# EAGLE board Pwr_spl (EAGLE 7.2.0)
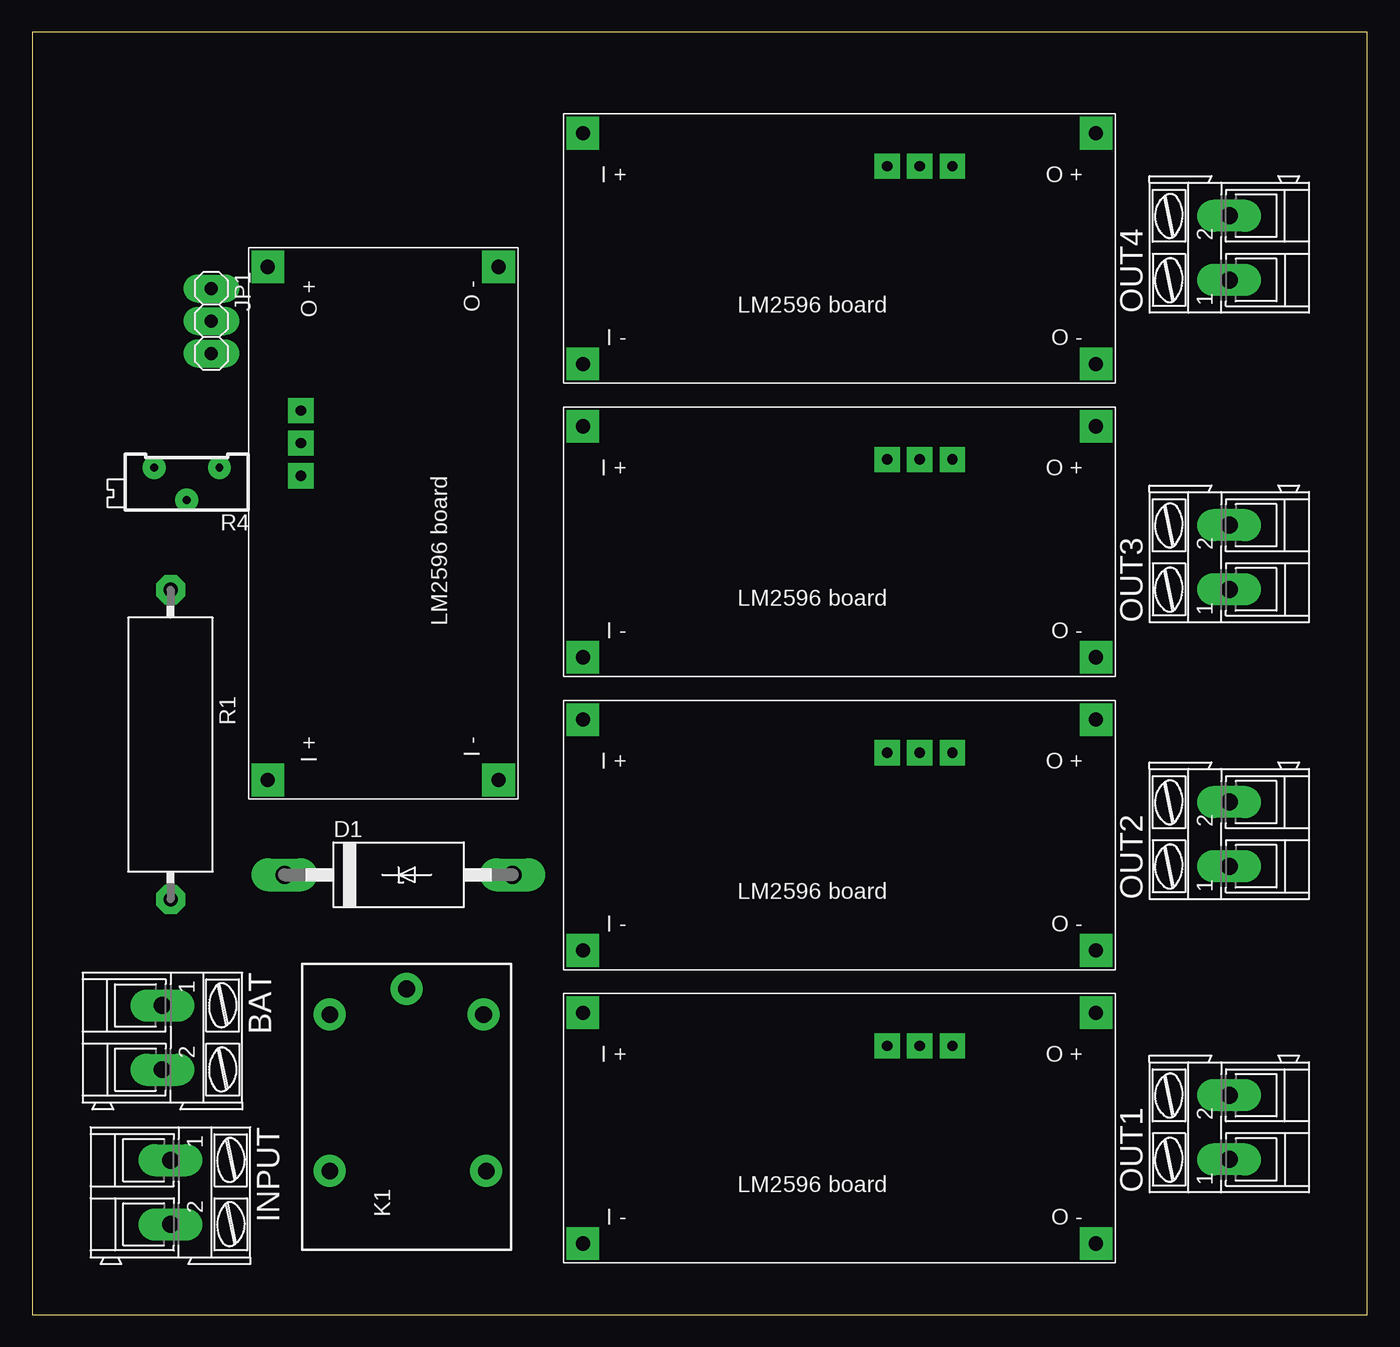
[diagram p0: board, top side]
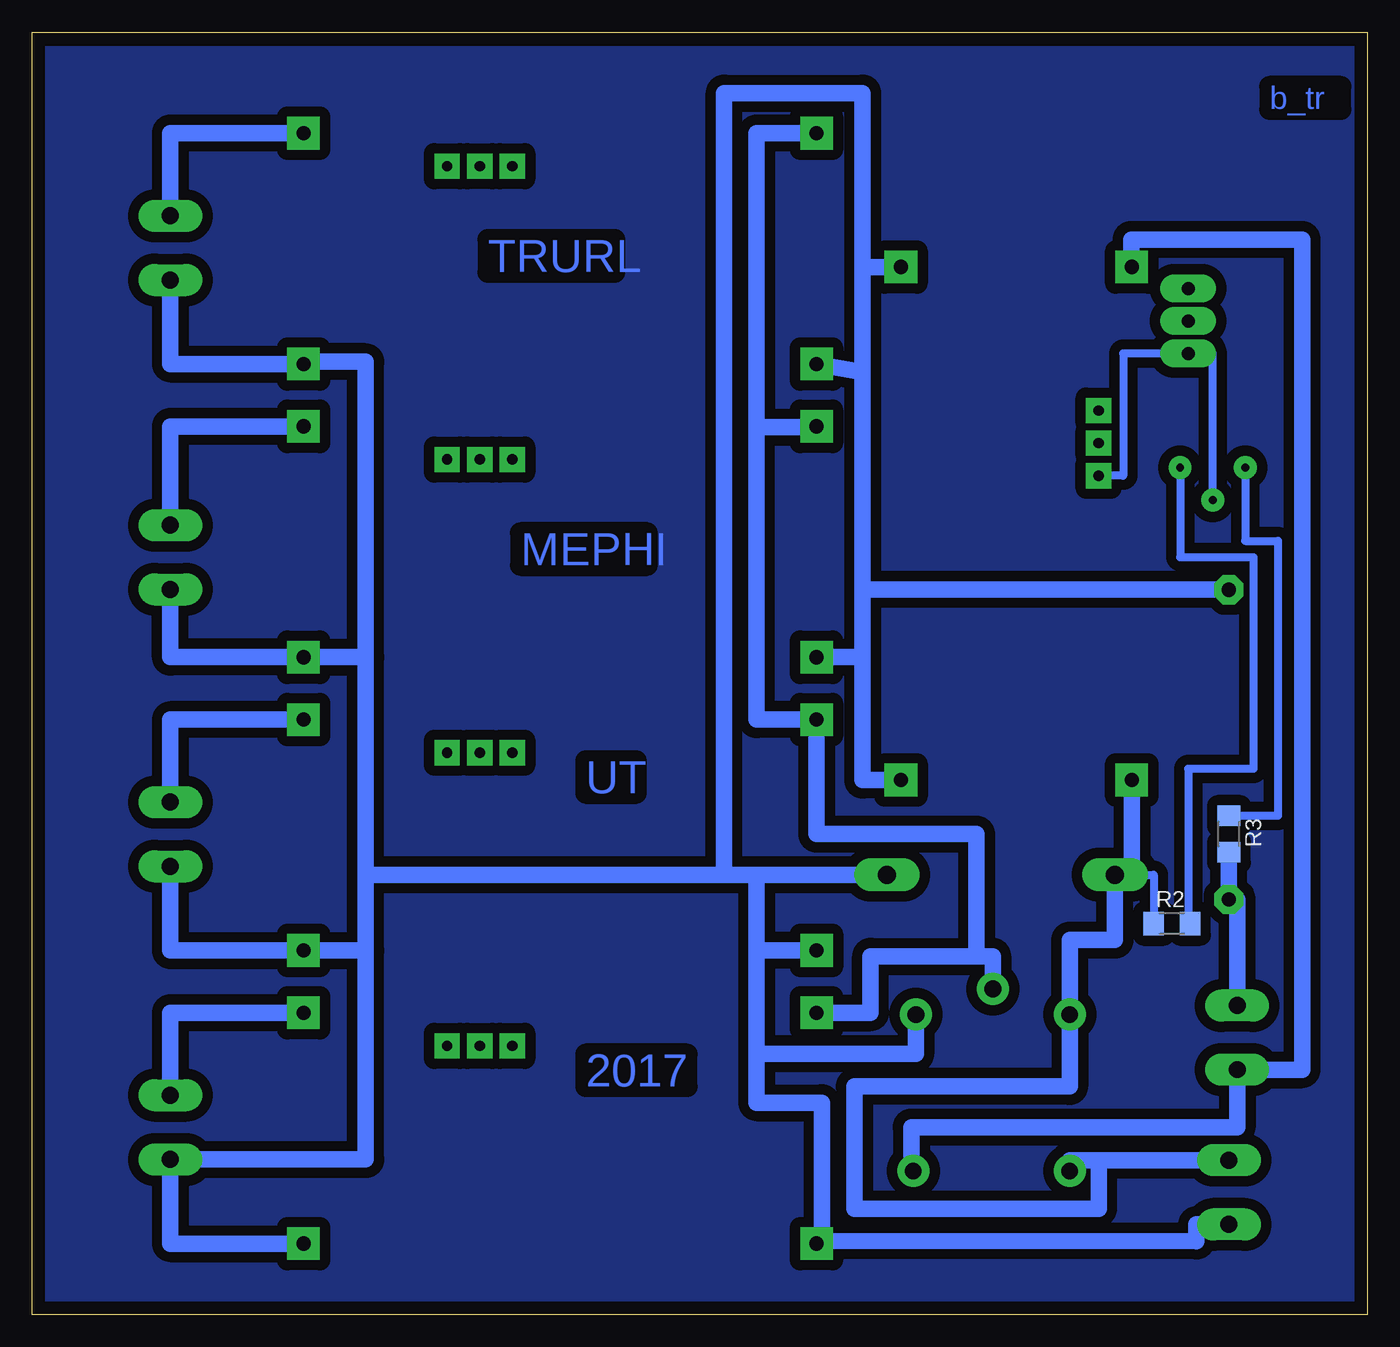
[diagram p1: board, bottom side, seen from below]

Size 104.12 x 100 mm. Coordinates in mm from the lower left corner, seen from the top.
Outline: 0,0 104.12,0 104.12,100 0,100 0,0
Copper layers (1*16): Top 0.035mm / dielectric 1.5mm / Bottom 0.035mm
Design rules "default *": minimum track width 10mil, minimum drill 24mil, track to track 8mil, track to pad 8mil, pad to pad 8mil, via to via 8mil, smd to smd 8mil, copper to edge 40mil, drill to drill 8mil, minimum pad ring 23mil, minimum via ring 20mil, stop-mask expansion 4mil, vias tented up to drill 0mil, thermal gap 10mil

## Footprints (pad centres in the part's own frame; a part is rotated, then mirrored left to right if it is on the bottom)
AK300/2 = drill 1.321 long: 1 -2.515,0; 2 2.489,0
LM2596-BOARD = drill 1.1 pad 2.54 square: I_+ 21.18,-7.66; I_- 21.18,10.34; O_+ -18.82,-7.66; O_- -18.82,10.34 | drill 0.8 pad 1.27 square: P$5 -7.62,-5.08; P$6 -5.08,-5.08; P$7 -2.54,-5.08
CB429-17 = drill 1.397 long: A 8.89,0; C -8.89,0
1X03 = drill 1.016 long: 1 -2.54,0; 2 0,0; 3 2.54,0
ZN5 = drill 1.3 pad 2.5: 11 8.89,0; 12 -5.31,-6.2; 14 -5.31,6; A1 6.89,6; A2 6.89,-6
VTA54 = drill 1.1 octagon: 1 -12.065,0; 2 12.065,0
R1206 = smd 1.6 x 1.803: 1 -1.422,0; 2 1.422,0
RTRIM64Z = drill 0.61: 1 0,-2.54; 2 -2.54,0; 3 0,2.54

## Placement (x,y rotation side)
BAT  [AK300/2]  10.16,21.59 270 top
CHRG  LM2596-BRD  [LM2596-BOARD]  26.04,62.87 270 top
D1  15KEXX  [CB429-17]  28.57,34.29 0 top
INPUT  [AK300/2]  10.79,9.53 270 top
JP1  [1X03]  13.97,77.47 270 top
K1  ZNS5448  [ZN5]  29.21,16.51 90 top
OUT1  [AK300/2]  93.34,14.61 90 top
OUT2  [AK300/2]  93.34,37.47 90 top
OUT3  [AK300/2]  93.34,59.05 90 top
OUT4  [AK300/2]  93.34,83.19 90 top
R1  [VTA54]  10.79,44.45 270 top
R2  2k  [R1206]  15.24,30.48 0 bottom
R3  2k  [R1206]  10.79,37.47 270 bottom
R4  1k  [RTRIM64Z]  12.06,66.04 90 top
U$2  LM2596-BRD  [LM2596-BOARD]  64.14,15.88 180 top
U$3  LM2596-BRD  [LM2596-BOARD]  64.14,38.73 180 top
U$4  LM2596-BRD  [LM2596-BOARD]  64.14,61.59 180 top
U$5  LM2596-BRD  [LM2596-BOARD]  64.14,84.45 180 top

## Library data of the parts
BAT INPUT OUT1-OUT4 = con-ptr500; OC_FARNELL: unknown; OC_NEWARK: unknown
CHRG U$2-U$5 = v-reg
D1 = diode
JP1 = pinhead
K1 = relay; OC_FARNELL: unknown; OC_NEWARK: unknown
R1 R4 = rcl
R2 R3 = resistor

## Nets
N$1: CHRG.I_- CHRG.O_- D1.A INPUT.2 K1.A2 OUT1.1 OUT2.1 OUT3.1 OUT4.1 R1.1 U$2.I_- U$2.O_- U$3.I_- U$3.O_- U$4.I_- U$4.O_- U$5.I_- U$5.O_-
N$2: CHRG.I_+ D1.C INPUT.1 K1.14 K1.A1 R2.1
N$3: K1.11 U$2.I_+ U$3.I_+ U$4.I_+ U$5.I_+
N$4: BAT.1 R1.2 R3.2
N$5: BAT.2 CHRG.O_+ K1.12
N$6: R3.1 R4.3
N$7: R2.2 R4.1
N$8: CHRG.P$7 JP1.3 R4.2
N$9: OUT1.2 U$2.O_+
N$11: OUT2.2 U$3.O_+
N$13: OUT3.2 U$4.O_+
N$15: OUT4.2 U$5.O_+

## Tracks (layer width: path | path; a pad name or v marks a point on that pad's centre or on a via)
N$1
  Bottom 1.27: OUT4.1 93.34,74.11 83.82,74.11 | 83.82,74.11 U$5.O_- | OUT2.1 93.34,28.39 U$3.O_- 78.11,28.39 | U$2.O_- 93.34,5.54 OUT1.1 78.11,12.09 78.11,28.39 | INPUT.2 13.34,7.04 13.34,5.71 42.55,5.77 | 42.55,5.77 42.95,5.77 U$2.I_- | 42.55,5.77 42.55,16.51 47.62,16.51 47.62,20.32 | U$3.I_- 47.62,28.39 | 47.62,28.39 47.62,20.32 | D1.A 47.62,34.29 | 47.62,34.29 47.62,28.39 | K1.A2 35.21,20.32 47.62,20.32 | CHRG.I_- 39.37,41.69 39.37,51.26 | R1.1 39.37,56.52 | 39.37,56.52 39.37,51.26 | U$4.I_- 39.37,51.26 | U$5.I_- 39.37,73.48 | 39.37,73.48 39.37,56.52 | CHRG.O_- 39.37,81.69 | 39.37,81.69 39.37,73.48 | 47.62,34.29 50.16,34.29 | 50.16,34.29 50.16,95.25 39.37,95.25 39.37,81.69 | 50.16,34.29 78.11,34.29 | 78.11,34.29 78.11,51.26 | 78.11,51.26 78.11,74.3 83.82,74.3 83.82,74.11 | 78.11,51.26 U$4.O_- 93.34,51.26 OUT3.1 | 78.11,28.39 78.11,34.29
N$2
  Bottom 0.61: D1.C 16.66,34.29 R2.1
  Bottom 1.27: INPUT.1 20.95,12.04 | 20.95,12.04 23.21,12.04 K1.14 | 20.95,12.04 20.95,8.26 40.01,8.26 40.01,17.78 23.21,17.78 K1.A1 23.21,29.21 19.68,29.21 D1.C 18.38,34.92 CHRG.I_+
N$3
  Bottom 1.27: U$2.I_+ 38.73,23.54 38.73,27.94 30.48,27.94 | 30.48,27.94 29.21,27.94 K1.11 | 30.48,27.94 30.48,37.47 42.95,37.47 U$3.I_+ 47.62,46.4 47.62,69.22 | 47.62,69.22 42.95,69.22 U$4.I_+ | U$5.I_+ 47.62,92.11 47.62,69.22
N$4
  Bottom 1.27: BAT.1 10.16,32.38 R1.2 R3.2
N$5
  Bottom 1.27: 35.41,11.43 K1.12 | 35.41,10.79 K1.12 | K1.12 35.56,11.2 35.56,14.61 10.16,14.61 BAT.2 5.08,19.1 5.08,83.82 18.41,83.82 18.41,81.28 17.74,81.92 CHRG.O_+
N$6
  Bottom 0.61: R4.3 9.53,60.33 6.99,60.33 6.99,38.89 R3.1
N$7
  Bottom 0.61: R4.1 14.61,59.05 8.89,59.05 8.89,42.55 13.97,42.55 13.97,30.48 R2.2
N$8
  Bottom 0.61: R4.2 12.06,74.93 JP1.3 19.05,74.93 19.05,65.41 CHRG.P$7
N$9
  Bottom 1.27: U$2.O_+ 93.34,23.54 OUT1.2
N$10
  pour Bottom (isolate 0.813): 0,0 104.14,0 104.14,99.06 0,99.06
N$11
  Bottom 1.27: U$3.O_+ 93.34,46.4 OUT2.2
N$13
  Bottom 1.27: U$4.O_+ 93.34,69.25 OUT3.2
N$15
  Bottom 1.27: U$5.O_+ 93.34,92.11 OUT4.2

## Text on the board
Bottom: b_tr | TRURL | MEPHI | UT | 2017